# Altium PCB hall_sensor.PcbDoc
Units mil, origin at the board's own origin, x right, y up, seen from the top; angles counter-clockwise.
Board outline 4190 x 2545 mil, 2 copper layers (Top Layer, Bottom Layer); 11 components, 14 nets, 69 pads, 973 vias.
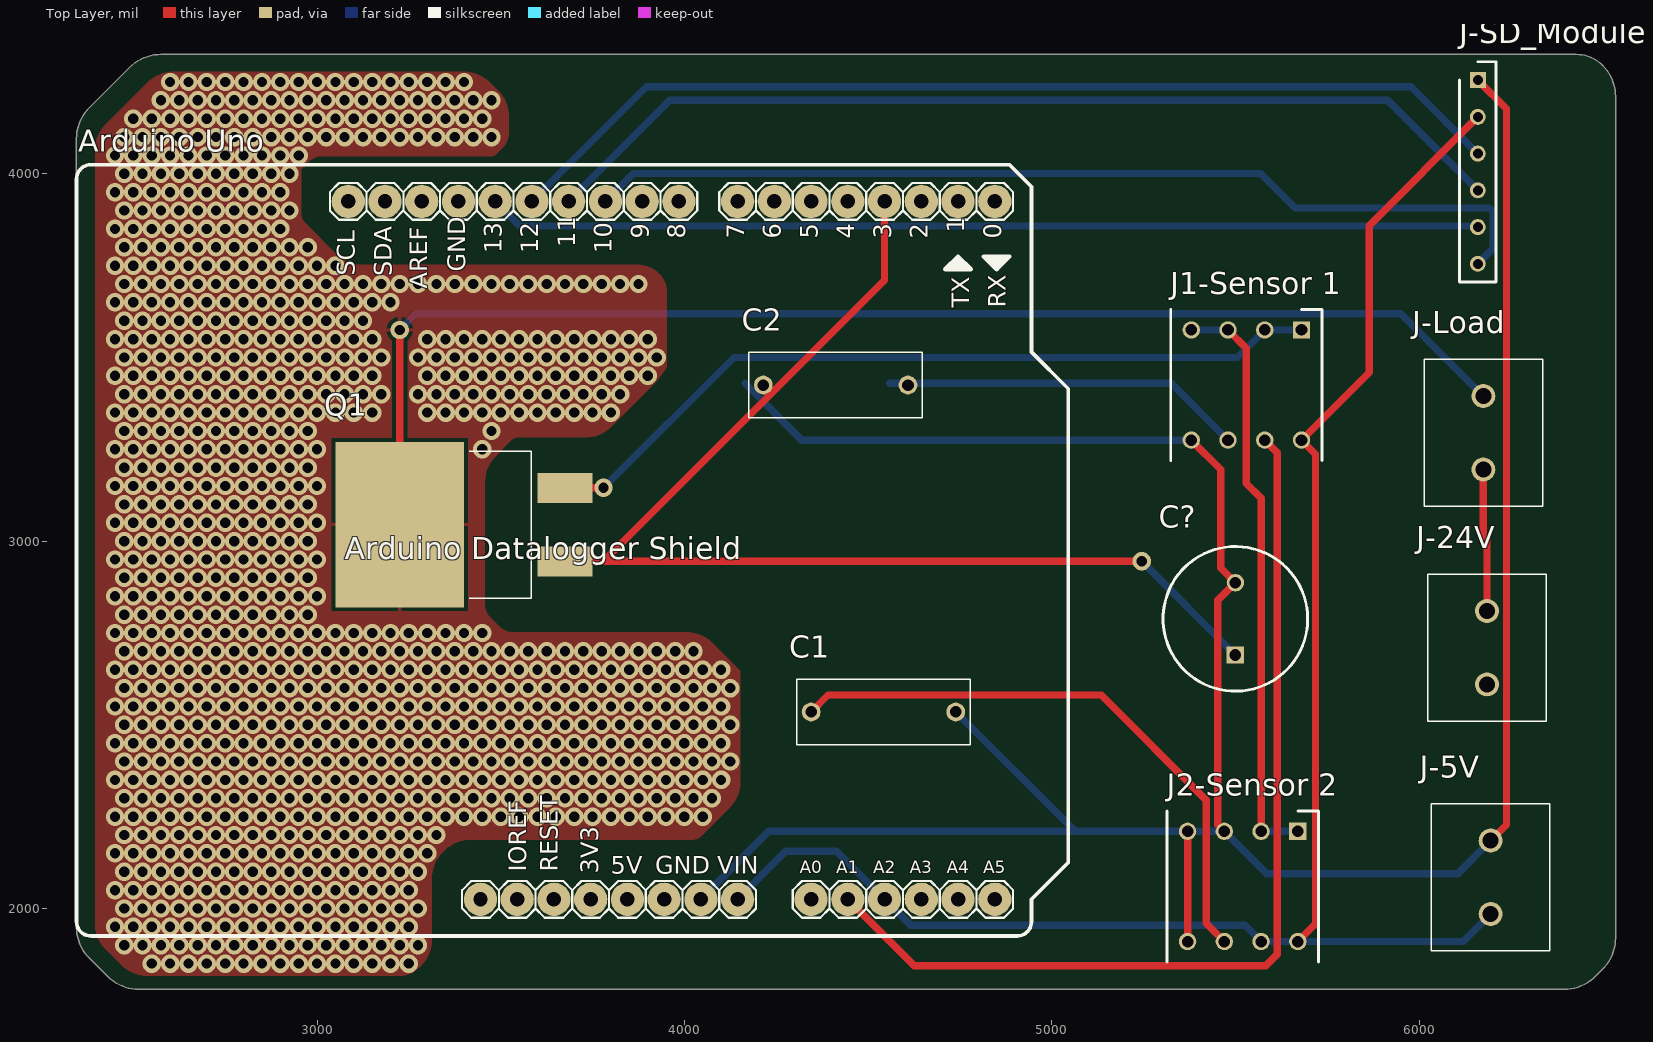
[diagram p0: Top Layer view]
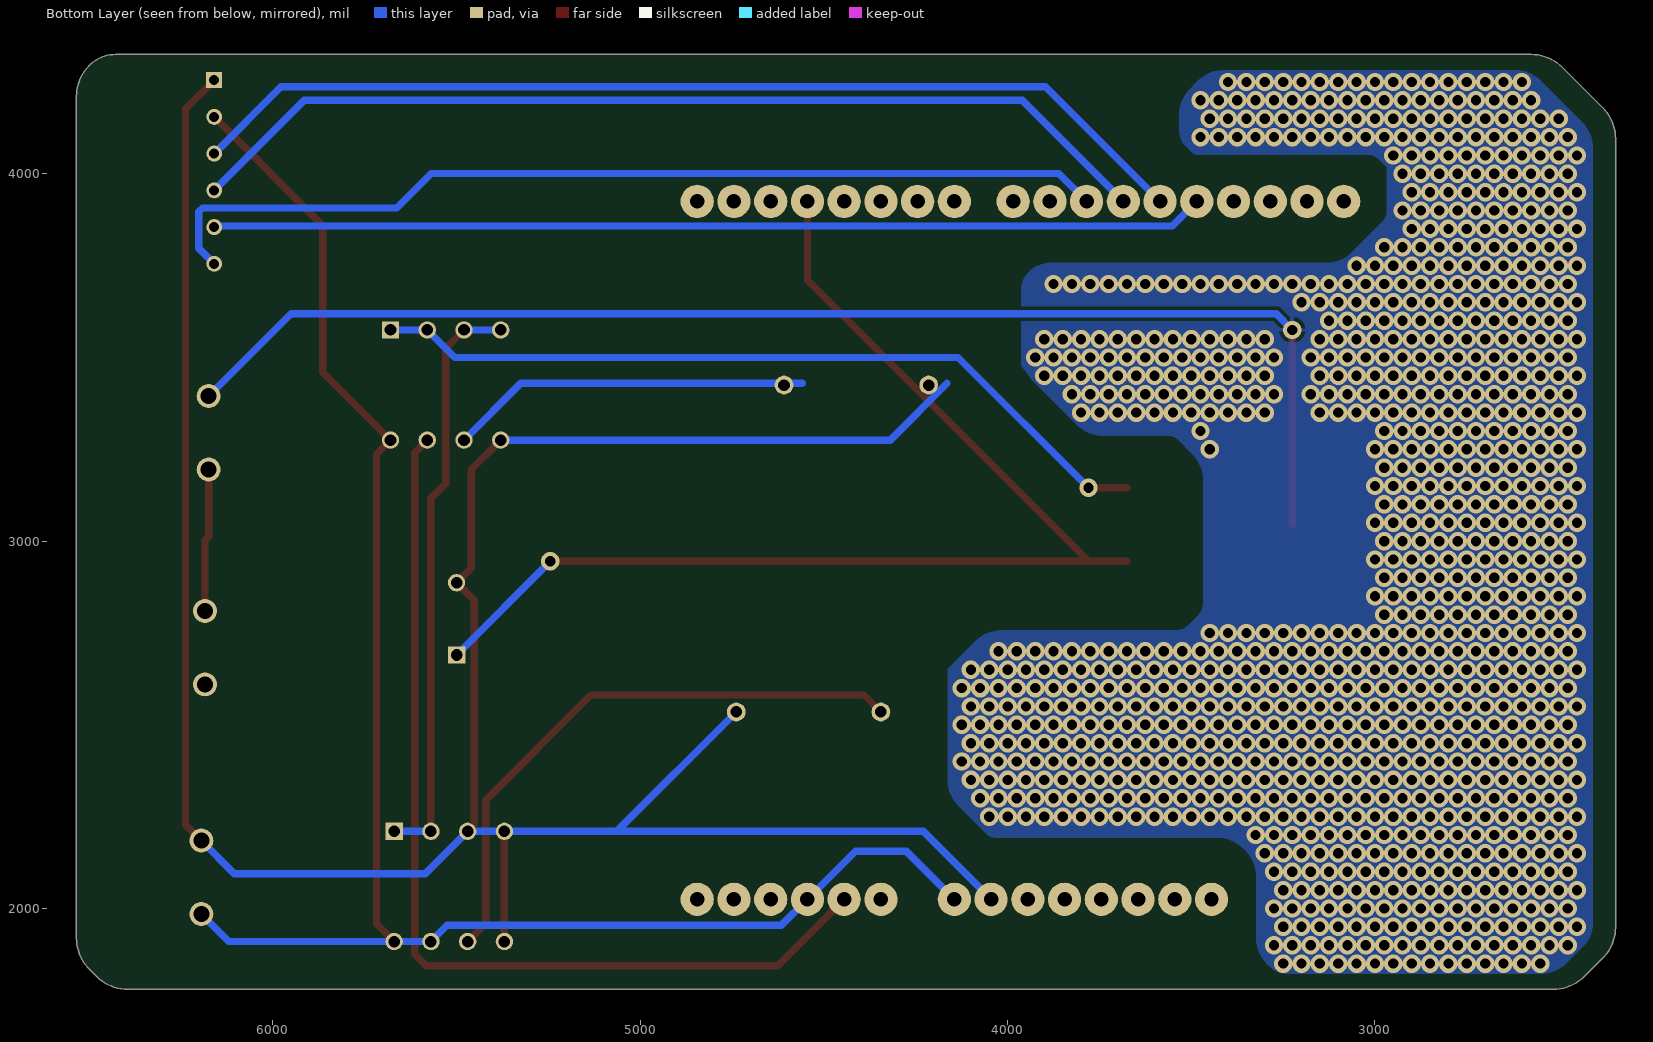
[diagram p1: Bottom Layer view, seen from below]
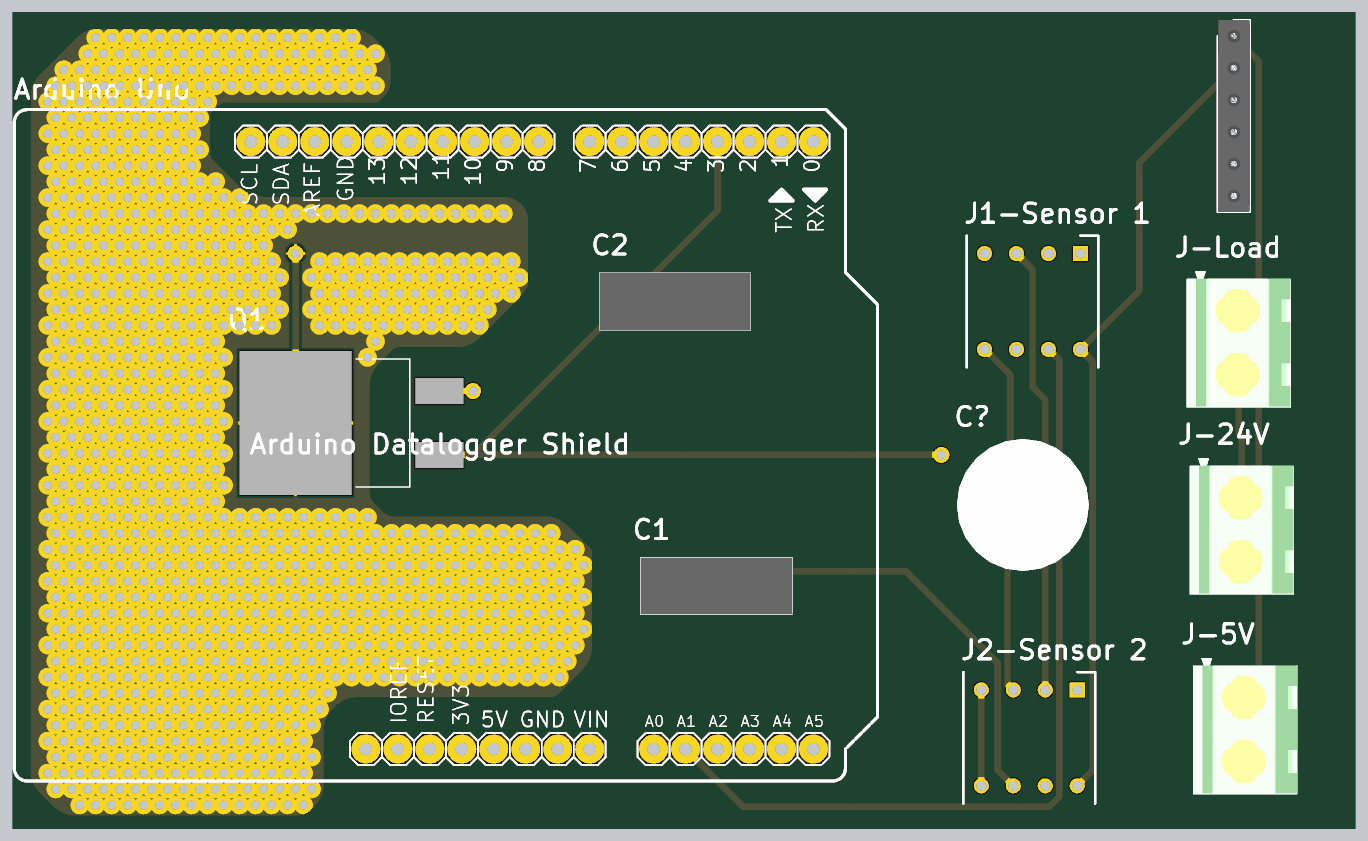
[diagram p2: 3D render of the assembled board from above, using the file's embedded part models]

## Layer stack, top to bottom
Top Solder: solder mask 0.4, Solder Resist, Dk 3.5
Top Layer: signal copper 1.4
Dielectric 1: dielectric 12.6, FR-4, Dk 4.8
Bottom Layer: signal copper 1.4
Bottom Solder: solder mask 0.4, Solder Resist, Dk 3.5

## Board outline
2380,1865 2429.64,1815.36 ccw(c2515,1900.71) 2515,1780 6395,1780 ccw(c6395,1900.71) 6480.36,1815.36 6499.64,1834.64 ccw(c6414.29,1920) 6535,1920 6535,4210 ccw(c6414.29,4210) 6499.64,4295.36 ccw(c6428.08,4223.79) 6428.08,4325 2575,4325 ccw(c2575,4204.29) 2489.64,4289.64 2380.36,4180.36 ccw(c2465.71,4095) 2345,4095 2345,1949.5 ccw(c2464.5,1949.5)

## Design rules (kind name [scope] priority, off if disabled: settings)
Clearance [All] p1: gap=10 ignorepadtopadclearanceinfootprint=FALSE
PolygonConnect [All] p1: connectstyle=Relief reliefconductorwidth=10 reliefentries=4 polygonreliefangle="90 Angle" airgapwidth=10
RoutingVias [All] p1: holewidth=28 width=50 viastyle="Through Hole" minholewidth=28 minwidth=50 maxholewidth=28 maxwidth=50
SolderMaskExpansion [All] p1: expansion=4 istentingtop=FALSE
SupplyNets "Schematic Supply Nets_1" [InNet('+5')] p1: voltage=0.000
SupplyNets "Schematic Supply Nets" [InNet('GND')] p2: voltage=0.000
Width [All] p1: maxlimit=30 minlimit=20 preferedwidth=20
30 further rules are at their usual default settings.

## Components (designator, comment, footprint, x,y, rotation, side; value= is the part's Value field where it differs from the comment)
"Arduino Uno" "ARDUINO UNO" "ARDUINO UNO" 3764.68,2969.88 r0 top locked
C1 "103MMR630K" 103MMR630K 4345,2535 r0 top
C2 "103MMR630K" 103MMR630K 4608.7,3425 r180 top
C? "ESH476M100AH2AA" CAPPRD500W60D1000H1700 5500,2690 r90 top
"J1-Sensor 1" "DILB8P-223TLF" DIPS762W60P254L1016H525Q8N 5680,3575 r270 top
"J2-Sensor 2" "DILB8P-223TLF" DIPS762W60P254L1016H525Q8N 5670,2210 r270 top
J-5V "282837-2" 2828372 6195,1985 r90 top
J-24V "282837-2" 2828372 6185,2610 r90 top
J-Load "282837-2" 2828372 6175,3195 r90 top
J-SD_Module "319-10-106-00-006000" RHDR6W51P0X254_1X6_1524X254X419P 6160,4255 r270 top
Q1 "IRGS14C40LPBF" IRF5305SPBF 3225,3045 r90 top

## Footprints (in the part's own frame and the unit in brackets; to place one, negate y for a bottom-side part, rotate by r counter-clockwise, add the part's x,y. Pads: shape width x height; smd on the part's side, far side on the other; paste and mask are expansions set on the pad)
103MMR630K [mm]
  round 1.3 hole 0.8: 1(0,0) 2(10,0)
  silkscreen extent -1,-2.25 11,2.25, body extent -1,-2.25 11,2.25, height 7.6
2828372 [mm]
  round 1.65 hole 1.1: 1(0,0) 2(5.08,0)
  silkscreen extent -2.54,-4.1 7.62,4.1, body extent -2.51,-4.11 8.25,4.09, height 9.84
"ARDUINO UNO" [mm]
  round 2.3 hole 1: 0(27.44,24.26) 1(24.9,24.26) 2(22.36,24.26) 3(19.82,24.26) 3.3V(-0.5,-24) 4(17.28,24.26) 5(14.74,24.26) 5V(2.04,-24) 6(12.2,24.26) 7(9.66,24.26) 8(5.596,24.26) 9(3.056,24.26) 10(0.516,24.26) 11(-2.024,24.26) 12(-4.564,24.26) 13(-7.104,24.26) A0(14.74,-24) A1(17.28,-24) A2(19.82,-24) A3(22.36,-24) A4(24.9,-24) A5(27.44,-24) AREF(-12.184,24.26) GND1(7.12,-24) GND2(4.58,-24) GND3(-9.644,24.26) IOREF(-5.58,-24) NC(-8.12,-24) RST(-3.04,-24) SCL(-17.264,24.26) SDA(-14.724,24.26) Vin(9.66,-24)
  silkscreen extent -36.06,-26.54 32.52,26.8
CAPPRD500W60D1000H1700 [mm]
  rect 1.2x1.2 hole 0.8: 1(0,0)
  round 1.2 hole 0.8: 2(5,0)
  silkscreen extent -2.5,-5 7.5,5, body extent -2.73,-5.25 7.73,5.25, height 17.01
DIPS762W60P254L1016H525Q8N [mm]
  rect 1.2x1.2 hole 0.8: 1(0,0)
  round 1.2 hole 0.8: 2(0,-2.54) 3(0,-5.08) 4(0,-7.62) 5(7.62,-7.62) 6(7.62,-5.08) 7(7.62,-2.54) 8(7.62,0)
  silkscreen extent -1.42,-9.04 9.04,1.42
IRF5305SPBF [mm]
  rect 2.08x3.81 smd: 1(-2.54,-11.43) 3(2.54,-11.43)
  rect 11.43x8.89 smd: 2(0,0)
  silkscreen extent -5.08,-13.65 5.08,-4.8
RHDR6W51P0X254_1X6_1524X254X419P [mm]
  rect 1.1x1.1 hole 0.7: 1(0,0)
  round 1.1 hole 0.7: 2(2.54,0) 3(5.08,0) 4(7.62,0) 5(10.16,0) 6(12.7,0)
  silkscreen extent -1.27,-1.27 13.97,1.27, body extent -1.27,-1.27 13.97,1.27, height 4.19

## Part data
C1 C2: "Capacitor", Manufacturer_Name="Cornell Dubilier", Mouser Part Number=598-103MMR630K, Datasheet Link=https://www.mouser.com/datasheet/2/88/MMR_series-553002.pdf, Height=7.5mm, Manufacturer_Part_Number=103MMR630K, Mouser Price/Stock=https://www.mouser.co.uk/ProductDetail/Cornell-Dubilier-CDE/103MMR630K?qs=3tP%252BN51vMXcfth17WDhGLA%3D%3D
C?: "Capacitor Polarised", Manufacturer_Name=KEMET, Mouser Part Number=80-ESH476M100AH2AA, Datasheet Link=https://content.kemet.com/datasheets/KEM_A4005_ESH.pdf, Height=17mm, Manufacturer_Part_Number=ESH476M100AH2AA, Mouser Price/Stock=https://www.mouser.co.uk/ProductDetail/KEMET/ESH476M100AH2AA?qs=T1%252BhWNR%252Bpa0giKIpYFuU0A%3D%3D
"J1-Sensor 1" "J2-Sensor 2": "Connector", Manufacturer_Name=Amphenol, Mouser Part Number=649-DILB8P223TLF, Arrow Part Number=DILB8P-223TLF, Arrow Price/Stock=https://www.arrow.com/en/products/dilb8p-223tlf/amphenol-fci?region=nac, Datasheet Link=https://cdn.amphenol-cs.com/media/wysiwyg/files/drawing/10052485.pdf, Height=5.25mm, Manufacturer_Part_Number=DILB8P-223TLF, Mouser Price/Stock=https://www.mouser.co.uk/ProductDetail/Amphenol-FCI/DILB8P-223TLF?qs=gISD9T5QW%2FAiSV%252BbCwW%2Fog%3D%3D
J-5V J-24V J-Load: "Connector", Manufacturer_Name="TE Connectivity", Mouser Part Number=571-2828372, Arrow Part Number=282837-2, Arrow Price/Stock=https://www.arrow.com/en/products/282837-2/te-connectivity?utm_currency=USD&region=europe, Datasheet Link=https://www.te.com/commerce/DocumentDelivery/DDEController?Action=srchrtrv&DocNm=1-1773458-1_EURO_STYLE_QRG&DocType=Data%20Sheet&DocLang=English&PartCntxt=282837-2&DocFormat=pdf, Height=10.3mm, Manufacturer_Part_Number=282837-2, Mouser Price/Stock=https://www.mouser.co.uk/ProductDetail/TE-Connectivity/282837-2?qs=A%252Bip%252BNCYi6O2H0NGWOeAxg%3D%3D
J-SD_Module: "Connector", Manufacturer_Name=Mill-Max, Mouser Part Number=575-3191010600006000, Arrow Part Number=319-10-106-00-006000, Arrow Price/Stock=https://www.arrow.com/en/products/319-10-106-00-006000/mill-max, Datasheet Link=https://componentsearchengine.com/Datasheets/1/319-10-106-00-006000.pdf, Height=4.191mm, Manufacturer_Part_Number=319-10-106-00-006000, Mouser Price/Stock=https://www.mouser.co.uk/ProductDetail/Mill-Max/319-10-106-00-006000?qs=493kPxzlxfJv4%252BKSTaxzuw%3D%3D
Q1: "Transistor IGBT", Manufacturer_Name=Infineon, Mouser Part Number=942-IRGS14C40LPBF, Arrow Part Number=IRGS14C40LPBF, Arrow Price/Stock=https://www.arrow.com/en/products/irgs14c40lpbf/infineon-technologies-ag, Datasheet Link=https://docs.rs-online.com/9fd5/0900766b80791357.pdf, Height=4.83mm, Manufacturer_Part_Number=IRGS14C40LPBF, Mouser Price/Stock=https://www.mouser.co.uk/ProductDetail/Infineon-Technologies/IRGS14C40LPBF?qs=XhjApVeIGIQ%252BRl3A6Rwg0Q%3D%3D

## Via types
v1: diameter 50, hole 28, Top Layer to Bottom Layer, 973 vias

## Nets (pads, with @x,y where several pads share a name; then routed paths per layer and width w, separated by ;. In a path a pad name is that pad's centre, name@x,y a point inside that pad or via, vN(x,y) a via of type N, cw(c..) or ccw(c..) an arc to the next point about the centre after c; other vN are vias at no path point)
+5: "Arduino Uno.A2" "Arduino Uno.Vin" "J1-Sensor 1.8" "J2-Sensor 2.7" "J2-Sensor 2.8" J-5V.1 J-SD_Module.2 | length 4716.7
  Top Layer w20: 5670,1910 5718,1958 5718,3237 5680,3275 5864,3459 5864,3859 J-SD_Module.2
  Bottom Layer w20: 4145,2025 4276,2156 4414,2156 4545,2025 4616,1954 5526,1954 5570,1910 5670,1910 6120,1910 J-5V.1
GND: "Arduino Uno.GND1" "J1-Sensor 1.5" "J2-Sensor 2.3" "J2-Sensor 2.4" "J2-Sensor 2.5" C1.2 C2.2 C?.2 J-5V.2 J-SD_Module.1 | length 7612.5
  Top Layer w20: 5370,1910 5370,2210 ; 5380,3275 5460,3195 5460,2926.85 C?.2 5452,2838.85 5452,2228 5470,2210 ; J-SD_Module.1 6238,4177 6238,2228 J-5V.2
  Bottom Layer w20: 4045,2025 4230,2210 5063.7,2210 ; 4165,3430 4320,3275 5380,3275 ; C1.2 5063.7,2210 ; J-5V.2 6105,2095 5585,2095 5470,2210 5370,2210 5063.7,2210
"NetArduino Uno_3": "Arduino Uno.3" C?.1 Q1.1 | length 3227.5
  Top Layer w20: Q1.1 3780,2945 ; 4545,3925 4545,3710 3780,2945 ; v1(5245,2945) 3780,2945
  Bottom Layer w20: v1(5245,2945) C?.1
"NetArduino Uno_10": "Arduino Uno.10" J-SD_Module.6 | length 2651
  Bottom Layer w20: 3785,3925 3861,4001 5569,4001 5663,3907 6192,3907 6202,3897 6202,3797 J-SD_Module.6
"NetArduino Uno_11": "Arduino Uno.11" J-SD_Module.4 | length 2690.4
  Bottom Layer w20: 3685,3925 3960,4200 5915,4200 J-SD_Module.4
"NetArduino Uno_12": "Arduino Uno.12" J-SD_Module.3 | length 2779.6
  Bottom Layer w20: 3585,3925 3897,4237 5978,4237 J-SD_Module.3
"NetArduino Uno_13": "Arduino Uno.13" J-SD_Module.5 | length 2705.8
  Bottom Layer w20: 3485,3925 3552,3858 6160,3858 J-SD_Module.5
"NetArduino Uno_A1": "Arduino Uno.A1" "J1-Sensor 1.7" | length 2670.9
  Top Layer w20: 4445,2025 4626,1844 5583,1844 5614,1875 5614,3241 5580,3275
NetC1_1: "J2-Sensor 2.6" C1.1 | length 1618.8
  Top Layer w20: C1.1 4391,2581 5135,2581 5421,2295 5421,1959 5470,1910
NetC2_1: "J1-Sensor 1.6" C2.1 | length 985.5
  Bottom Layer w20: 4558.7,3430 5325,3430 5480,3275
"NetJ1-Sensor 1_1": "J1-Sensor 1.1" "J1-Sensor 1.2" Q1.3 | length 2183.1
  Top Layer w20: Q1.3 v1(3780,3145)
  Bottom Layer w20: v1(3780,3145) 4135,3500 5505,3500 5580,3575 5680,3575
"NetJ1-Sensor 1_3": "J1-Sensor 1.3" "J1-Sensor 1.4" "J2-Sensor 2.1" "J2-Sensor 2.2" | length 1602.3
  Top Layer w20: 5480,3575 5530,3525 5530,3157 5570,3117 5570,2210
  Bottom Layer w20: 5380,3575 5480,3575 ; 5570,2210 5670,2210
NetJ-24V_2: J-24V.2 J-Load.1 | length 389.1
  Top Layer w20: J-Load.1 6175,3013 6185,3003 J-24V.2
NetJ-Load_2: J-Load.2 Q1.2 | length 3591
  Top Layer w20: Q1.2 v1(3225,3575)
  Bottom Layer w20: v1(3225,3575) 3269,3619 5951,3619 J-Load.2
  other v1: 2550,1850 2600,1850 2650,1850 2700,1850 2750,1850 2800,1850 2850,1850 2900,1850 2950,1850 3000,1850 3050,1850 3100,1850 3150,1850 3200,1850 3250,1850 2475,1900 2525,1900 2575,1900 2625,1900 2675,1900 2725,1900 2775,1900 2825,1900 2875,1900 2925,1900 2975,1900 3025,1900 3075,1900 3125,1900 3175,1900 3225,1900 3275,1900 2450,1950 2500,1950 2550,1950 2600,1950 2650,1950 2700,1950 2750,1950 2800,1950 2850,1950 2900,1950 2950,1950 3000,1950 3050,1950 3100,1950 3150,1950 3200,1950 3250,1950 2475,2000 2525,2000 2575,2000 2625,2000 2675,2000 2725,2000 2775,2000 2825,2000 2875,2000 2925,2000 2975,2000 3025,2000 3075,2000 3125,2000 3175,2000 3225,2000 3275,2000 2450,2050 2500,2050 2550,2050 2600,2050 2650,2050 2700,2050 2750,2050 2800,2050 2850,2050 2900,2050 2950,2050 3000,2050 3050,2050 3100,2050 3150,2050 3200,2050 3250,2050 2475,2100 2525,2100 2575,2100 2625,2100 2675,2100 2725,2100 2775,2100 2825,2100 2875,2100 2925,2100 2975,2100 3025,2100 3075,2100 3125,2100 3175,2100 3225,2100 3275,2100 2450,2150 2500,2150 2550,2150 2600,2150 2650,2150 2700,2150 2750,2150 2800,2150 2850,2150 2900,2150 2950,2150 3000,2150 3050,2150 3100,2150 3150,2150 3200,2150 3250,2150 3300,2150 2475,2200 2525,2200 2575,2200 2625,2200 2675,2200 2725,2200 2775,2200 2825,2200 2875,2200 2925,2200 2975,2200 3025,2200 3075,2200 3125,2200 3175,2200 3225,2200 3275,2200 3325,2200 2450,2250 2500,2250 2550,2250 2600,2250 2650,2250 2700,2250 2750,2250 2800,2250 2850,2250 2900,2250 2950,2250 3000,2250 3050,2250 3100,2250 3150,2250 3200,2250 3250,2250 3300,2250 3350,2250 3400,2250 3450,2250 3500,2250 3550,2250 3600,2250 3650,2250 3700,2250 3750,2250 3800,2250 3850,2250 3900,2250 3950,2250 4000,2250 4050,2250 2475,2300 2525,2300 2575,2300 2625,2300 2675,2300 2725,2300 2775,2300 2825,2300 2875,2300 2925,2300 2975,2300 3025,2300 3075,2300 3125,2300 3175,2300 3225,2300 3275,2300 3325,2300 3375,2300 3425,2300 3475,2300 3525,2300 3575,2300 3625,2300 3675,2300 3725,2300 3775,2300 3825,2300 3875,2300 3925,2300 3975,2300 4025,2300 4075,2300 2450,2350 2500,2350 2550,2350 2600,2350 2650,2350 2700,2350 2750,2350 2800,2350 2850,2350 2900,2350 2950,2350 3000,2350 3050,2350 3100,2350 3150,2350 3200,2350 3250,2350 3300,2350 3350,2350 3400,2350 3450,2350 3500,2350 3550,2350 3600,2350 3650,2350 3700,2350 3750,2350 3800,2350 3850,2350 3900,2350 3950,2350 4000,2350 4050,2350 4100,2350 2475,2400 2525,2400 2575,2400 2625,2400 2675,2400 2725,2400 2775,2400 2825,2400 2875,2400 2925,2400 2975,2400 3025,2400 3075,2400 3125,2400 3175,2400 3225,2400 3275,2400 3325,2400 3375,2400 3425,2400 3475,2400 3525,2400 3575,2400 3625,2400 3675,2400 3725,2400 3775,2400 3825,2400 3875,2400 3925,2400 3975,2400 4025,2400 4075,2400 4125,2400 2450,2450 2500,2450 2550,2450 2600,2450 2650,2450 2700,2450 2750,2450 2800,2450 2850,2450 2900,2450 2950,2450 3000,2450 3050,2450 3100,2450 3150,2450 3200,2450 3250,2450 3300,2450 3350,2450 3400,2450 3450,2450 3500,2450 3550,2450 3600,2450 3650,2450 3700,2450 3750,2450 3800,2450 3850,2450 3900,2450 3950,2450 4000,2450 4050,2450 4100,2450 2475,2500 2525,2500 2575,2500 2625,2500 2675,2500 2725,2500 2775,2500 2825,2500 2875,2500 2925,2500 2975,2500 3025,2500 3075,2500 3125,2500 3175,2500 3225,2500 3275,2500 3325,2500 3375,2500 3425,2500 3475,2500 3525,2500 3575,2500 3625,2500 3675,2500 3725,2500 3775,2500 3825,2500 3875,2500 3925,2500 3975,2500 4025,2500 4075,2500 4125,2500 2450,2550 2500,2550 2550,2550 2600,2550 2650,2550 2700,2550 2750,2550 2800,2550 2850,2550 2900,2550 2950,2550 3000,2550 3050,2550 3100,2550 3150,2550 3200,2550 3250,2550 3300,2550 3350,2550 3400,2550 3450,2550 3500,2550 3550,2550 3600,2550 3650,2550 3700,2550 3750,2550 3800,2550 3850,2550 3900,2550 3950,2550 4000,2550 4050,2550 4100,2550 2475,2600 2525,2600 2575,2600 2625,2600 2675,2600 2725,2600 2775,2600 2825,2600 2875,2600 2925,2600 2975,2600 3025,2600 3075,2600 3125,2600 3175,2600 3225,2600 3275,2600 3325,2600 3375,2600 3425,2600 3475,2600 3525,2600 3575,2600 3625,2600 3675,2600 3725,2600 3775,2600 3825,2600 3875,2600 3925,2600 3975,2600 4025,2600 4075,2600 4125,2600 2450,2650 2500,2650 2550,2650 2600,2650 2650,2650 2700,2650 2750,2650 2800,2650 2850,2650 2900,2650 2950,2650 3000,2650 3050,2650 3100,2650 3150,2650 3200,2650 3250,2650 3300,2650 3350,2650 3400,2650 3450,2650 3500,2650 3550,2650 3600,2650 3650,2650 3700,2650 3750,2650 3800,2650 3850,2650 3900,2650 3950,2650 4000,2650 4050,2650 4100,2650 2475,2700 2525,2700 2575,2700 2625,2700 2675,2700 2725,2700 2775,2700 2825,2700 2875,2700 2925,2700 2975,2700 3025,2700 3075,2700 3125,2700 3175,2700 3225,2700 3275,2700 3325,2700 3375,2700 3425,2700 3475,2700 3525,2700 3575,2700 3625,2700 3675,2700 3725,2700 3775,2700 3825,2700 3875,2700 3925,2700 3975,2700 4025,2700 2450,2750 2500,2750 2550,2750 2600,2750 2650,2750 2700,2750 2750,2750 2800,2750 2850,2750 2900,2750 2950,2750 3000,2750 3050,2750 3100,2750 3150,2750 3200,2750 3250,2750 3300,2750 3350,2750 3400,2750 3450,2750 2475,2800 2525,2800 2575,2800 2625,2800 2675,2800 2725,2800 2775,2800 2825,2800 2875,2800 2925,2800 2975,2800 2450,2850 2500,2850 2550,2850 2600,2850 2650,2850 2700,2850 2750,2850 2800,2850 2850,2850 2900,2850 2950,2850 3000,2850 2475,2900 2525,2900 2575,2900 2625,2900 2675,2900 2725,2900 2775,2900 2825,2900 2875,2900 2925,2900 2975,2900 2450,2950 2500,2950 2550,2950 2600,2950 2650,2950 2700,2950 2750,2950 2800,2950 2850,2950 2900,2950 2950,2950 3000,2950 2475,3000 2525,3000 2575,3000 2625,3000 2675,3000 2725,3000 2775,3000 2825,3000 2875,3000 2925,3000 2975,3000 2450,3050 2500,3050 2550,3050 2600,3050 2650,3050 2700,3050 2750,3050 2800,3050 2850,3050 2900,3050 2950,3050 3000,3050 2475,3100 2525,3100 2575,3100 2625,3100 2675,3100 2725,3100 2775,3100 2825,3100 2875,3100 2925,3100 2975,3100 2450,3150 2500,3150 2550,3150 2600,3150 2650,3150 2700,3150 2750,3150 2800,3150 2850,3150 2900,3150 2950,3150 3000,3150 2475,3200 2525,3200 2575,3200 2625,3200 2675,3200 2725,3200 2775,3200 2825,3200 2875,3200 2925,3200 2975,3200 2450,3250 2500,3250 2550,3250 2600,3250 2650,3250 2700,3250 2750,3250 2800,3250 2850,3250 2900,3250 2950,3250 3000,3250 3450,3250 2475,3300 2525,3300 2575,3300 2625,3300 2675,3300 2725,3300 2775,3300 2825,3300 2875,3300 2925,3300 2975,3300 3475,3300 2450,3350 2500,3350 2550,3350 2600,3350 2650,3350 2700,3350 2750,3350 2800,3350 2850,3350 2900,3350 2950,3350 3000,3350 3050,3350 3100,3350 3150,3350 3300,3350 3350,3350 3400,3350 3450,3350 3500,3350 3550,3350 3600,3350 3650,3350 3700,3350 3750,3350 3800,3350 2475,3400 2525,3400 2575,3400 2625,3400 2675,3400 2725,3400 2775,3400 2825,3400 2875,3400 2925,3400 2975,3400 3025,3400 3075,3400 3125,3400 3175,3400 3275,3400 3325,3400 3375,3400 3425,3400 3475,3400 3525,3400 3575,3400 3625,3400 3675,3400 3725,3400 3775,3400 3825,3400 2450,3450 2500,3450 2550,3450 2600,3450 2650,3450 2700,3450 2750,3450 2800,3450 2850,3450 2900,3450 2950,3450 3000,3450 3050,3450 3100,3450 3150,3450 3300,3450 3350,3450 3400,3450 3450,3450 3500,3450 3550,3450 3600,3450 3650,3450 3700,3450 3750,3450 3800,3450 3850,3450 3900,3450 2475,3500 2525,3500 2575,3500 2625,3500 2675,3500 2725,3500 2775,3500 2825,3500 2875,3500 2925,3500 2975,3500 3025,3500 3075,3500 3125,3500 3175,3500 3275,3500 3325,3500 3375,3500 3425,3500 3475,3500 3525,3500 3575,3500 3625,3500 3675,3500 3725,3500 3775,3500 3825,3500 3875,3500 3925,3500 2450,3550 2500,3550 2550,3550 2600,3550 2650,3550 2700,3550 2750,3550 2800,3550 2850,3550 2900,3550 2950,3550 3000,3550 3050,3550 3100,3550 3150,3550 3300,3550 3350,3550 3400,3550 3450,3550 3500,3550 3550,3550 3600,3550 3650,3550 3700,3550 3750,3550 3800,3550 3850,3550 3900,3550 2475,3600 2525,3600 2575,3600 2625,3600 2675,3600 2725,3600 2775,3600 2825,3600 2875,3600 2925,3600 2975,3600 3025,3600 3075,3600 3125,3600 2450,3650 2500,3650 2550,3650 2600,3650 2650,3650 2700,3650 2750,3650 2800,3650 2850,3650 2900,3650 2950,3650 3000,3650 3050,3650 3100,3650 3150,3650 3200,3650 2475,3700 2525,3700 2575,3700 2625,3700 2675,3700 2725,3700 2775,3700 2825,3700 2875,3700 2925,3700 2975,3700 3025,3700 3075,3700 3125,3700 3175,3700 3225,3700 3275,3700 3325,3700 3375,3700 3425,3700 3475,3700 3525,3700 3575,3700 3625,3700 3675,3700 3725,3700 3775,3700 3825,3700 3875,3700 2450,3750 2500,3750 2550,3750 2600,3750 2650,3750 2700,3750 2750,3750 2800,3750 2850,3750 2900,3750 2950,3750 3000,3750 3050,3750 2475,3800 2525,3800 2575,3800 2625,3800 2675,3800 2725,3800 2775,3800 2825,3800 2875,3800 2925,3800 2975,3800 2450,3850 2500,3850 2550,3850 2600,3850 2650,3850 2700,3850 2750,3850 2800,3850 2850,3850 2900,3850 2475,3900 2525,3900 2575,3900 2625,3900 2675,3900 2725,3900 2775,3900 2825,3900 2875,3900 2925,3900 2450,3950 2500,3950 2550,3950 2600,3950 2650,3950 2700,3950 2750,3950 2800,3950 2850,3950 2900,3950 2475,4000 2525,4000 2575,4000 2625,4000 2675,4000 2725,4000 2775,4000 2825,4000 2875,4000 2925,4000 2450,4050 2500,4050 2550,4050 2600,4050 2650,4050 2700,4050 2750,4050 2800,4050 2850,4050 2900,4050 2950,4050 2475,4100 2525,4100 2575,4100 2625,4100 2675,4100 2725,4100 2775,4100 2825,4100 2875,4100 2925,4100 2975,4100 3025,4100 3075,4100 3125,4100 3175,4100 3225,4100 3275,4100 3325,4100 3375,4100 3425,4100 3475,4100 2500,4150 2550,4150 2600,4150 2650,4150 2700,4150 2750,4150 2800,4150 2850,4150 2900,4150 2950,4150 3000,4150 3050,4150 3100,4150 3150,4150 3200,4150 3250,4150 3300,4150 3350,4150 3400,4150 3450,4150 2575,4200 2625,4200 2675,4200 2725,4200 2775,4200 2825,4200 2875,4200 2925,4200 2975,4200 3025,4200 3075,4200 3125,4200 3175,4200 3225,4200 3275,4200 3325,4200 3375,4200 3425,4200 3475,4200 2600,4250 2650,4250 2700,4250 2750,4250 2800,4250 2850,4250 2900,4250 2950,4250 3000,4250 3050,4250 3100,4250 3150,4250 3200,4250 3250,4250 3300,4250 3350,4250 3400,4250
pads on no net: "Arduino Uno.0" "Arduino Uno.1" "Arduino Uno.2" "Arduino Uno.3.3V" "Arduino Uno.4" "Arduino Uno.5" "Arduino Uno.5V" "Arduino Uno.6" "Arduino Uno.7" "Arduino Uno.8" "Arduino Uno.9" "Arduino Uno.A0" "Arduino Uno.A3" "Arduino Uno.A4" "Arduino Uno.A5" "Arduino Uno.AREF" "Arduino Uno.GND2" "Arduino Uno.GND3" "Arduino Uno.IOREF" "Arduino Uno.NC" "Arduino Uno.RST" "Arduino Uno.SCL" "Arduino Uno.SDA" J-24V.1

## Polygon pours and split planes (outlines as drawn)
NetJ-Load_2 on Top Layer "NETJ-LOAD_2_L01_P002" (solid, pour order 2): 3921.85,3432.39 3801.14,3311.68 cw(c3730.43,3382.39) 3730.43,3282.39 3551.85,3282.39 ccw(c3551.85,3246.17) 3526.24,3271.78 3486.14,3231.68 ccw(c3556.85,3160.97) 3456.85,3160.97 3456.85,2827.39 ccw(c3505.13,2827.39) 3470.99,2793.25 3496.85,2767.39 ccw(c3533.06,2803.6) 3533.06,2752.39 4005.43,2752.39 cw(c4005.43,2652.39) 4076.14,2723.1 4151.85,2647.39 4151.85,2343.81 cw(c4051.85,2343.81) 4122.56,2273.1 4046.85,2197.39 cw(c4022.7,2221.53) 4022.7,2187.39 3418.27,2187.39 ccw(c3418.27,2087.39) 3347.56,2158.1 3341.14,2151.68 ccw(c3411.85,2080.97) 3311.85,2080.97 3311.85,1913.81 cw(c3211.85,1913.81) 3282.56,1843.1 3276.85,1837.39 cw(c3228.56,1885.67) 3228.56,1817.39 2536.85,1817.39 cw(c2536.85,1913.96) 2468.56,1845.67 2421.85,1892.39 cw(c2482.2,1952.74) 2396.85,1952.74 2396.85,4065.97 cw(c2496.85,4065.97) 2426.14,4136.68 2537.56,4248.1 cw(c2608.27,4177.39) 2608.27,4277.39 3400.43,4277.39 cw(c3400.43,4177.39) 3471.14,4248.1 3492.56,4226.68 cw(c3421.85,4155.97) 3521.85,4155.97 3521.85,4112.39 cw(c3461.49,4112.39) 3504.17,4069.71 3486.85,4052.39 cw(c3474.78,4064.46) 3474.78,4047.39 3011.85,4047.39 ccw(c3011.85,3999.1) 2977.7,4033.25 2956.85,4012.39 2956.85,3892.39 ccw(c2993.06,3892.39) 2967.45,3866.78 3052.56,3781.68 ccw(c3123.27,3852.39) 3123.27,3752.39 3871.49,3752.39 cw(c3871.49,3667.03) 3931.85,3727.39 cw(c3883.56,3679.1) 3951.85,3679.1 3951.85,3472.39
NetJ-Load_2 on Bottom Layer "NETJ-LOAD_2_L02_P003" (solid, pour order 3): 3932.5,3437.5 3811.79,3316.79 cw(c3741.08,3387.5) 3741.08,3287.5 3562.5,3287.5 ccw(c3562.5,3251.29) 3536.89,3276.89 3496.79,3236.79 ccw(c3567.5,3166.08) 3467.5,3166.08 3467.5,2832.5 ccw(c3515.78,2832.5) 3481.64,2798.36 3507.5,2772.5 ccw(c3543.71,2808.71) 3543.71,2757.5 4016.08,2757.5 cw(c4016.08,2657.5) 4086.79,2728.21 4162.5,2652.5 4162.5,2348.92 cw(c4062.5,2348.92) 4133.21,2278.21 4057.5,2202.5 cw(c4033.36,2226.64) 4033.36,2192.5 3428.92,2192.5 ccw(c3428.92,2092.5) 3358.21,2163.21 3351.79,2156.79 ccw(c3422.5,2086.08) 3322.5,2086.08 3322.5,1918.92 cw(c3222.5,1918.92) 3293.21,1848.21 3287.5,1842.5 cw(c3239.22,1890.78) 3239.22,1822.5 2547.5,1822.5 cw(c2547.5,1919.07) 2479.22,1850.78 2432.5,1897.5 cw(c2492.86,1957.86) 2407.5,1957.86 2407.5,4071.08 cw(c2507.5,4071.08) 2436.79,4141.79 2548.21,4253.21 cw(c2618.92,4182.5) 2618.92,4282.5 3411.08,4282.5 cw(c3411.08,4182.5) 3481.79,4253.21 3503.21,4231.79 cw(c3432.5,4161.08) 3532.5,4161.08 3532.5,4117.5 cw(c3472.14,4117.5) 3514.82,4074.82 3497.5,4057.5 cw(c3485.43,4069.57) 3485.43,4052.5 3022.5,4052.5 ccw(c3022.5,4004.22) 2988.36,4038.36 2967.5,4017.5 2967.5,3897.5 ccw(c3003.71,3897.5) 2978.11,3871.89 3063.21,3786.79 ccw(c3133.92,3857.5) 3133.92,3757.5 3882.14,3757.5 cw(c3882.14,3672.14) 3942.5,3732.5 cw(c3894.22,3684.22) 3962.5,3684.22 3962.5,3477.5

## Silkscreen, mask and mechanical layers (free items; w line width, h text height)
Board:
  lines w10: 2345,1949.5 ccw(c2464.5,1949.5) 2380,1865 2429.64,1815.36 ccw(c2515,1900.71) 2515,1780 6395,1780 ccw(c6395,1900.71) 6480.36,1815.36 6499.64,1834.64 ccw(c6414.29,1920) 6535,1920 6535,4210 ccw(c6414.29,4210) 6499.64,4295.36 ccw(c6428.08,4223.79) 6428.08,4325 6380,4325 2575,4325 ccw(c2575,4204.29) 2489.64,4289.64 2380.36,4180.36 ccw(c2465.71,4095) 2345,4095 2345,1949.5

## Text inside footprints (layer, text, board x,y; h text height)
"Arduino Uno": Top Overlay "5V" at 3800,2095 h47.6; Top Overlay "A0" at 4314,2096 h34; Top Overlay "AREF" at 3299.58,3686.52 h47.6 r90; Top Overlay "GND" at 3403.58,3733.11 h47.6 r90; Top Overlay "RESET" at 3655,2100 h47.6 r90; Top Overlay "3V3" at 3765,2095 h47.6 r90; Top Overlay "A1" at 4414,2096 h34; Top Overlay "A2" at 4514,2096 h34; Top Overlay "A3" at 4614,2096 h34; Top Overlay "A4" at 4714,2096 h34; Top Overlay "A5" at 4814,2096 h34; Top Overlay "VIN" at 4090,2095 h47.6; Top Overlay "GND" at 3921,2095 h47.6; Top Overlay "IOREF" at 3570,2100 h47.6 r90; Top Overlay "TX" at 4775,3636 h47.6 r90; Top Overlay "RX" at 4875,3635 h47.6 r90; Top Overlay "13" at 3502.58,3783.62 h47.6 r90; Top Overlay "12" at 3602.58,3783.62 h47.6 r90; Top Overlay "11" at 3702.58,3799.48 h47.6 r90; Top Overlay "10" at 3802.58,3783.62 h47.6 r90; Top Overlay "9" at 3902.58,3823.28 h47.6 r90; Top Overlay "8" at 4002.58,3823.28 h47.6 r90; Top Overlay "7" at 4162.58,3823.28 h47.6 r90; Top Overlay "6" at 4262.58,3823.28 h47.6 r90; Top Overlay "5" at 4362.58,3823.28 h47.6 r90; Top Overlay "4" at 4462.58,3823.28 h47.6 r90; Top Overlay "3" at 4562.58,3823.28 h47.6 r90; Top Overlay "2" at 4662.58,3823.28 h47.6 r90; Top Overlay "1" at 4762.58,3839.14 h47.6 r90; Top Overlay "0" at 4862.58,3823.28 h47.6 r90; Top Overlay "SCL" at 3103.27,3721.85 h47.6 r90; Top Overlay "SDA" at 3202.82,3721.34 h47.6 r90; Top Overlay "Arduino Datalogger Shield" at 3075.71,2950.2 h60